# EAGLE board panelized (EAGLE 7.0.0)
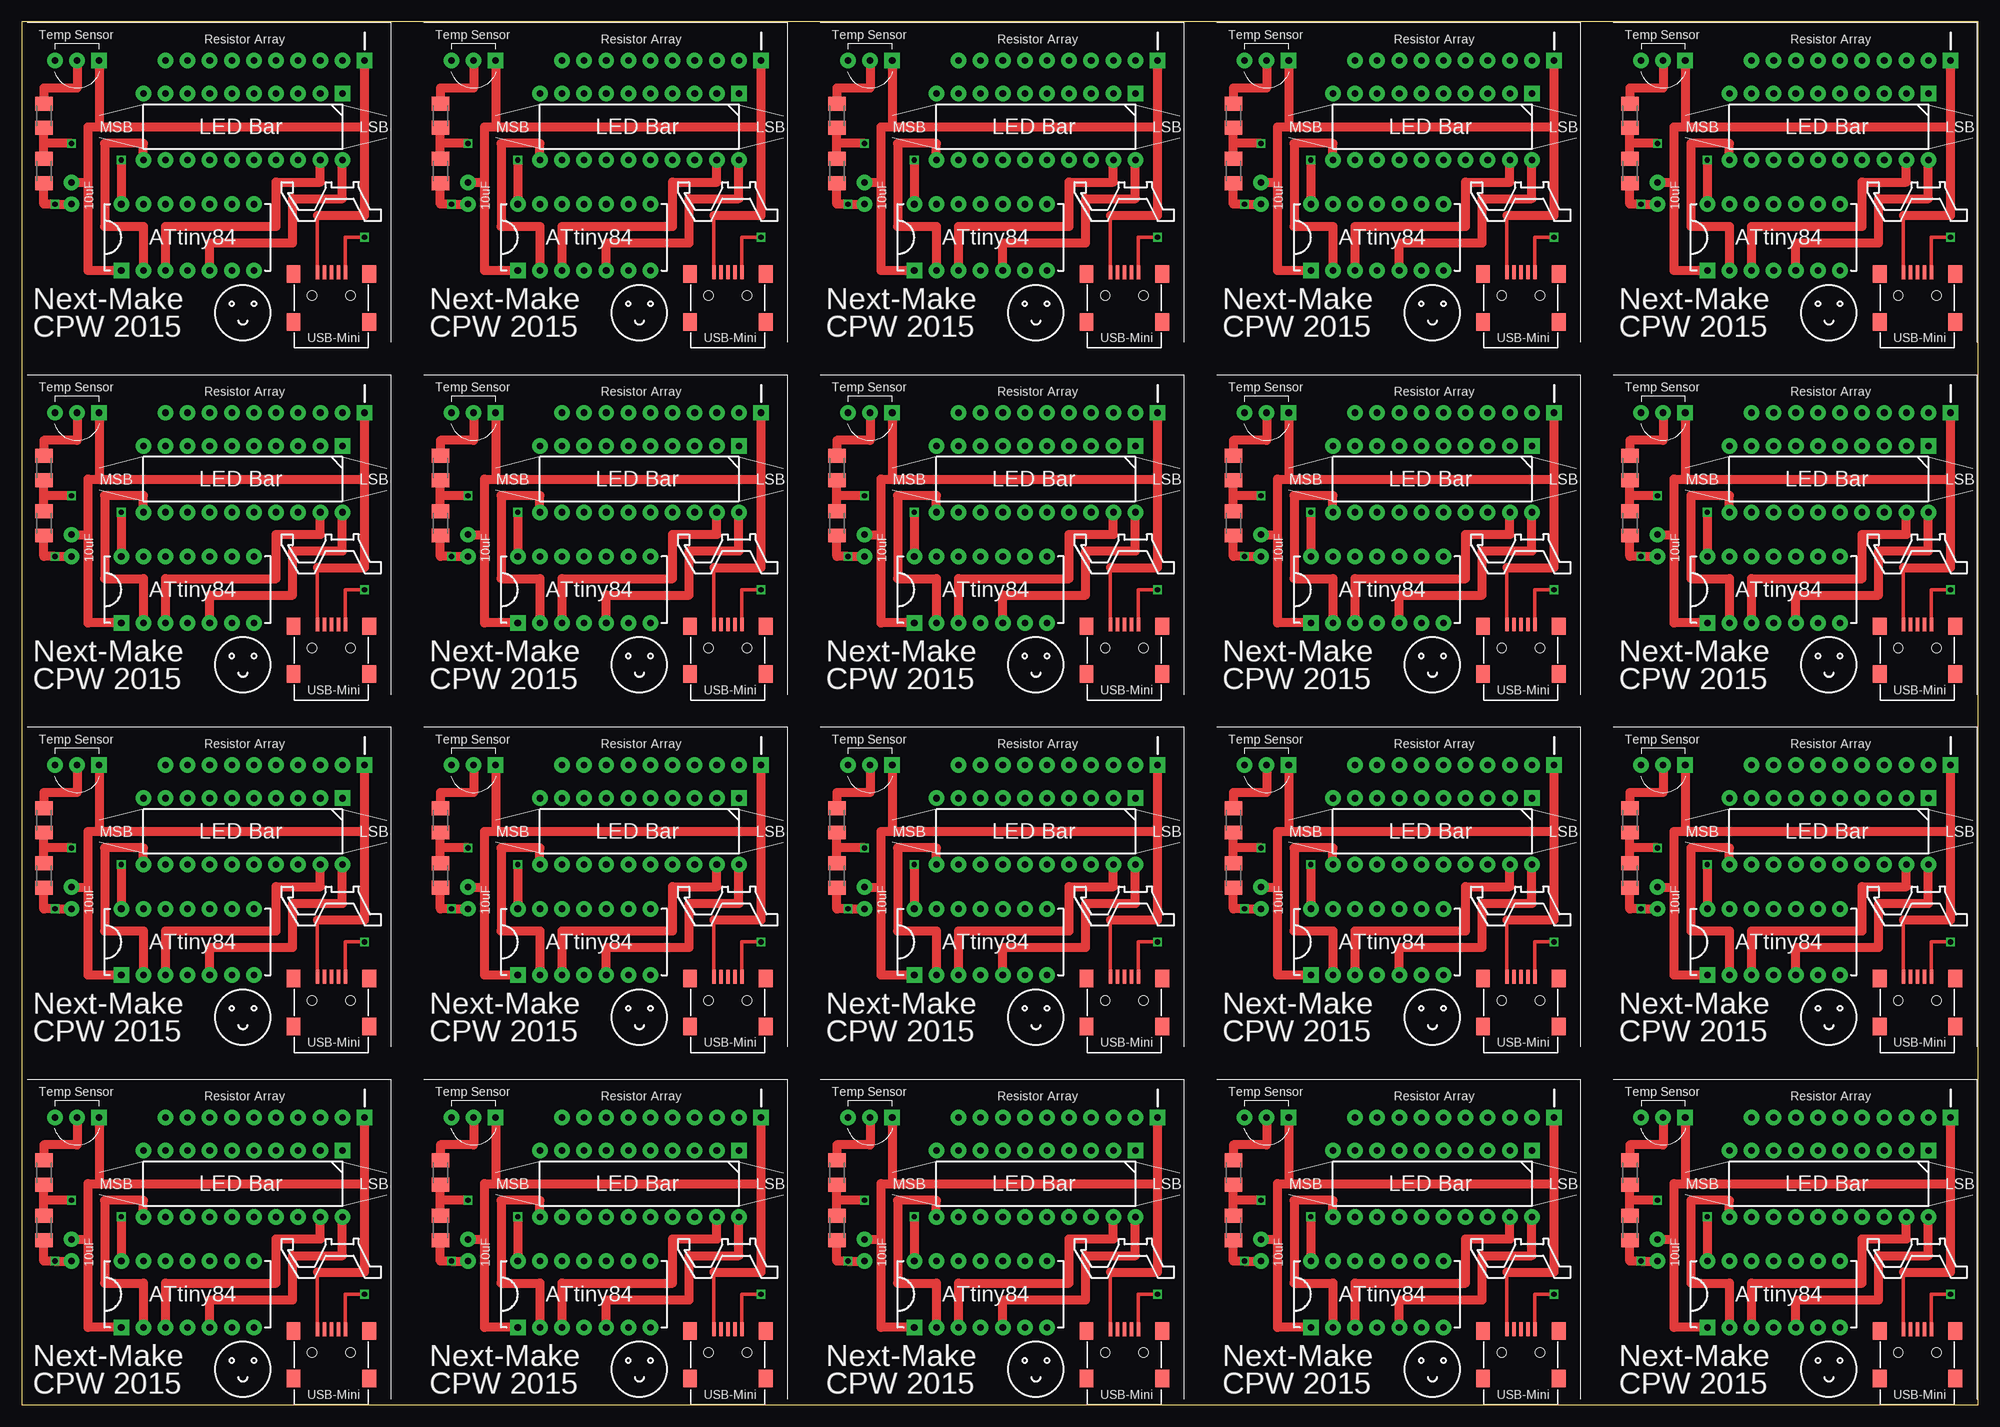
[diagram p0: board, top side]
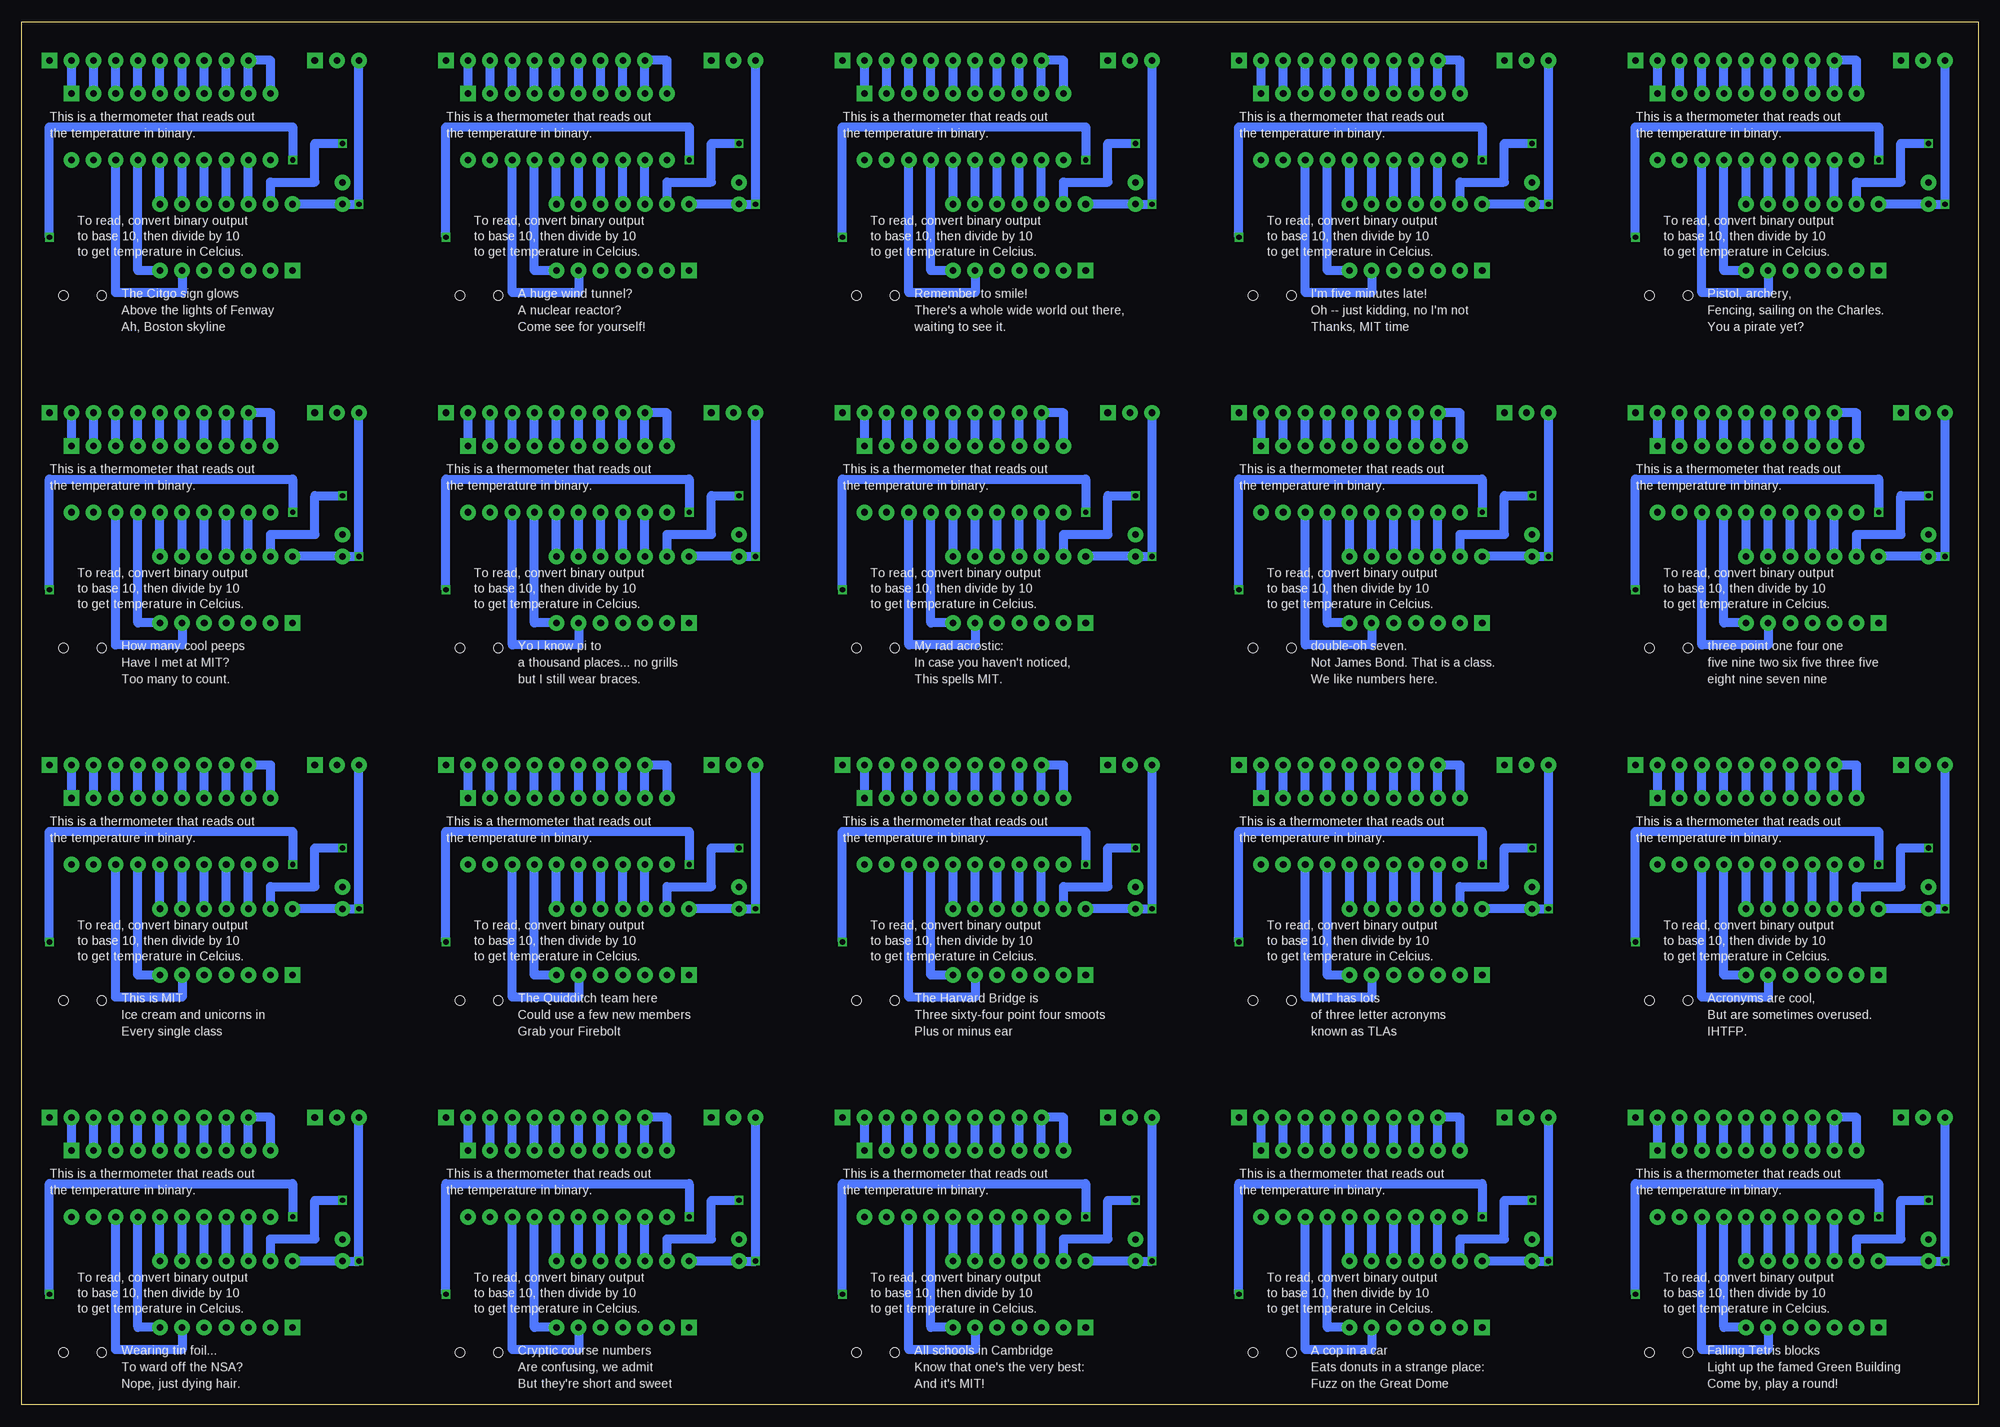
[diagram p1: board, bottom side, seen from below]

Size 224.72 x 158.86 mm. Coordinates in mm from the lower left corner, seen from the top.
Outline: 224.72,158.86 0,158.86 0,0 224.72,0 224.72,158.86
Copper layers (1*16): Top 0.035mm / dielectric 1.5mm / Bottom 0.035mm
Design rules "default *": minimum track width 10mil, minimum drill 24mil, track to track 8mil, track to pad 8mil, pad to pad 8mil, via to via 8mil, smd to smd 8mil, copper to edge 40mil, drill to drill 8mil, minimum pad ring 10mil, minimum via ring 8mil, stop-mask expansion 4mil, vias tented up to drill 25mil, thermal gap 10mil

## Footprints (pad centres in the part's own frame; a part is rotated, then mirrored left to right if it is on the bottom)
M1206 = smd 1.6 x 2: 1 -1.4,0; 2 1.4,0
SIP-10 = drill 0.762 pad 1.778 square: PIN_1 0,0 | drill 0.762 pad 1.778: PIN_2 0,-2.54; PIN_3 0,-5.08; PIN_4 0,-7.62; PIN_5 0,-10.16; PIN_6 0,-12.7; PIN_7 0,-15.24; PIN_8 0,-17.78; PIN_9 0,-20.32; PIN_10 0,-22.86
CAP_FK18 = drill 0.75 pad 1.75: PIN_1 0,0; PIN_2 2.5,0
PDIP-14 = drill 0.762 pad 1.778 square: PIN_1 0,15.24 | drill 0.762 pad 1.778: PIN_2 0,12.7; PIN_3 0,10.16; PIN_4 0,7.62; PIN_5 0,5.08; PIN_6 0,2.54; PIN_7 0,0; PIN_8 7.62,0; PIN_9 7.62,2.54; PIN_10 7.62,5.08; PIN_11 7.62,7.62; PIN_12 7.62,10.16; PIN_13 7.62,12.7; PIN_14 7.62,15.24
LED_X10_BAR = drill 0.762 pad 1.778 square: PIN_1 0,0 | drill 0.762 pad 1.778: PIN_2 0,-2.54; PIN_3 0,-5.08; PIN_4 0,-7.62; PIN_5 0,-10.16; PIN_6 0,-12.7; PIN_7 0,-15.24; PIN_8 0,-17.78; PIN_9 0,-20.32; PIN_10 0,-22.86; PIN_11 7.62,-22.86; PIN_12 7.62,-20.32; PIN_13 7.62,-17.78; PIN_14 7.62,-15.24; PIN_15 7.62,-12.7; PIN_16 7.62,-10.16; PIN_17 7.62,-7.62; PIN_18 7.62,-5.08; PIN_19 7.62,-2.54; PIN_20 7.62,0
TO-92-3 = drill 0.762 pad 1.778 square: PIN_1 0,0 | drill 0.762 pad 1.778: PIN_2 2.54,0; PIN_3 5.08,0
SMT_MINI_USB = smd 1.6 x 0.4: +5V 8.7,1.6; D+ 8.7,0; D- 8.7,0.8; GND 8.7,-1.6; ID 8.7,-0.8 | smd 2 x 1.6: FOOR_2 8.5,-4.35; FOOT_1 3,-4.35; FOOT_3 8.5,4.35; FOOT_4 3,4.35 | hole 1.1: 6,-2.2; 6,2.2

## Placement (x,y rotation side)
R1  1K  [M1206]  2.54,20.32 270 top
R2  1K  [M1206]  2.54,26.67 270 top
U$1  9X_1K_BUSSED_R  [SIP-10]  39.37,33.02 270 top
U$2  10UF_FK18  [CAP_FK18]  5.71,16.51 90 top
U$3  ATTINY84A  [PDIP-14]  26.67,8.89 90 top
U$4  LED_X10_BAR  [LED_X10_BAR]  36.83,29.21 270 top
U$5  MCP9701  [TO-92-3]  8.89,33.02 180 top
U$6  USB_MINI  [SMT_MINI_USB]  35.56,0 90 top
ZZZ$1  9X_1K_BUSSED_R  [SIP-10]  39.37,73.48 270 top
ZZZ$2  9X_1K_BUSSED_R  [SIP-10]  39.37,113.95 270 top
ZZZ$3  9X_1K_BUSSED_R  [SIP-10]  39.37,154.41 270 top
ZZZ$4  9X_1K_BUSSED_R  [SIP-10]  84.92,33.02 270 top
ZZZ$5  9X_1K_BUSSED_R  [SIP-10]  84.92,73.48 270 top
ZZZ$6  9X_1K_BUSSED_R  [SIP-10]  84.92,113.95 270 top
ZZZ$7  9X_1K_BUSSED_R  [SIP-10]  84.92,154.41 270 top
ZZZ$8  9X_1K_BUSSED_R  [SIP-10]  130.46,33.02 270 top
ZZZ$9  9X_1K_BUSSED_R  [SIP-10]  130.46,73.48 270 top
ZZZ$10  9X_1K_BUSSED_R  [SIP-10]  130.46,113.95 270 top
ZZZ$11  9X_1K_BUSSED_R  [SIP-10]  130.46,154.41 270 top
ZZZ$12  9X_1K_BUSSED_R  [SIP-10]  176,33.02 270 top
ZZZ$13  9X_1K_BUSSED_R  [SIP-10]  176,73.48 270 top
ZZZ$14  9X_1K_BUSSED_R  [SIP-10]  176,113.95 270 top
ZZZ$15  9X_1K_BUSSED_R  [SIP-10]  176,154.41 270 top
ZZZ$16  9X_1K_BUSSED_R  [SIP-10]  221.55,33.02 270 top
ZZZ$17  9X_1K_BUSSED_R  [SIP-10]  221.55,73.48 270 top
ZZZ$18  9X_1K_BUSSED_R  [SIP-10]  221.55,113.95 270 top
ZZZ$19  9X_1K_BUSSED_R  [SIP-10]  221.55,154.41 270 top
ZZZ$21  10UF_FK18  [CAP_FK18]  5.71,56.98 90 top
ZZZ$22  10UF_FK18  [CAP_FK18]  5.71,97.44 90 top
ZZZ$23  10UF_FK18  [CAP_FK18]  5.71,137.91 90 top
ZZZ$24  10UF_FK18  [CAP_FK18]  51.26,16.51 90 top
ZZZ$25  10UF_FK18  [CAP_FK18]  51.26,56.98 90 top
ZZZ$26  10UF_FK18  [CAP_FK18]  51.26,97.44 90 top
ZZZ$27  10UF_FK18  [CAP_FK18]  51.26,137.91 90 top
ZZZ$28  10UF_FK18  [CAP_FK18]  96.81,16.51 90 top
ZZZ$29  10UF_FK18  [CAP_FK18]  96.81,56.98 90 top
ZZZ$30  10UF_FK18  [CAP_FK18]  96.81,97.44 90 top
ZZZ$31  10UF_FK18  [CAP_FK18]  96.81,137.91 90 top
ZZZ$32  10UF_FK18  [CAP_FK18]  142.35,16.51 90 top
ZZZ$33  10UF_FK18  [CAP_FK18]  142.35,56.98 90 top
ZZZ$34  10UF_FK18  [CAP_FK18]  142.35,97.44 90 top
ZZZ$35  10UF_FK18  [CAP_FK18]  142.35,137.91 90 top
ZZZ$36  10UF_FK18  [CAP_FK18]  187.9,16.51 90 top
ZZZ$37  10UF_FK18  [CAP_FK18]  187.9,56.98 90 top
ZZZ$38  10UF_FK18  [CAP_FK18]  187.9,97.44 90 top
ZZZ$39  10UF_FK18  [CAP_FK18]  187.9,137.91 90 top
ZZZ$41  ATTINY84A  [PDIP-14]  26.67,49.35 90 top
ZZZ$42  ATTINY84A  [PDIP-14]  26.67,89.82 90 top
ZZZ$43  ATTINY84A  [PDIP-14]  26.67,130.28 90 top
ZZZ$44  ATTINY84A  [PDIP-14]  72.22,8.89 90 top
ZZZ$45  ATTINY84A  [PDIP-14]  72.22,49.35 90 top
ZZZ$46  ATTINY84A  [PDIP-14]  72.22,89.82 90 top
ZZZ$47  ATTINY84A  [PDIP-14]  72.22,130.28 90 top
ZZZ$48  ATTINY84A  [PDIP-14]  117.76,8.89 90 top
ZZZ$49  ATTINY84A  [PDIP-14]  117.76,49.35 90 top
ZZZ$50  ATTINY84A  [PDIP-14]  117.76,89.82 90 top
ZZZ$51  ATTINY84A  [PDIP-14]  117.76,130.28 90 top
ZZZ$52  ATTINY84A  [PDIP-14]  163.31,8.89 90 top
ZZZ$53  ATTINY84A  [PDIP-14]  163.31,49.35 90 top
ZZZ$54  ATTINY84A  [PDIP-14]  163.31,89.82 90 top
ZZZ$55  ATTINY84A  [PDIP-14]  163.31,130.28 90 top
ZZZ$56  ATTINY84A  [PDIP-14]  208.85,8.89 90 top
ZZZ$57  ATTINY84A  [PDIP-14]  208.85,49.35 90 top
ZZZ$58  ATTINY84A  [PDIP-14]  208.85,89.82 90 top
ZZZ$59  ATTINY84A  [PDIP-14]  208.85,130.28 90 top
ZZZ$61  LED_X10_BAR  [LED_X10_BAR]  36.83,69.67 270 top
ZZZ$62  LED_X10_BAR  [LED_X10_BAR]  36.83,110.14 270 top
ZZZ$63  LED_X10_BAR  [LED_X10_BAR]  36.83,150.6 270 top
ZZZ$64  LED_X10_BAR  [LED_X10_BAR]  82.38,29.21 270 top
ZZZ$65  LED_X10_BAR  [LED_X10_BAR]  82.38,69.67 270 top
ZZZ$66  LED_X10_BAR  [LED_X10_BAR]  82.38,110.14 270 top
ZZZ$67  LED_X10_BAR  [LED_X10_BAR]  82.38,150.6 270 top
ZZZ$68  LED_X10_BAR  [LED_X10_BAR]  127.92,29.21 270 top
ZZZ$69  LED_X10_BAR  [LED_X10_BAR]  127.92,69.67 270 top
ZZZ$70  LED_X10_BAR  [LED_X10_BAR]  127.92,110.14 270 top
ZZZ$71  LED_X10_BAR  [LED_X10_BAR]  127.92,150.6 270 top
ZZZ$72  LED_X10_BAR  [LED_X10_BAR]  173.47,29.21 270 top
ZZZ$73  LED_X10_BAR  [LED_X10_BAR]  173.47,69.67 270 top
ZZZ$74  LED_X10_BAR  [LED_X10_BAR]  173.47,110.14 270 top
ZZZ$75  LED_X10_BAR  [LED_X10_BAR]  173.47,150.6 270 top
ZZZ$76  LED_X10_BAR  [LED_X10_BAR]  219.01,29.21 270 top
ZZZ$77  LED_X10_BAR  [LED_X10_BAR]  219.01,69.67 270 top
ZZZ$78  LED_X10_BAR  [LED_X10_BAR]  219.01,110.14 270 top
ZZZ$79  LED_X10_BAR  [LED_X10_BAR]  219.01,150.6 270 top
ZZZ$81  MCP9701  [TO-92-3]  8.89,73.48 180 top
ZZZ$82  MCP9701  [TO-92-3]  8.89,113.95 180 top
ZZZ$83  MCP9701  [TO-92-3]  8.89,154.41 180 top
ZZZ$84  MCP9701  [TO-92-3]  54.44,33.02 180 top
ZZZ$85  MCP9701  [TO-92-3]  54.44,73.48 180 top
ZZZ$86  MCP9701  [TO-92-3]  54.44,113.95 180 top
ZZZ$87  MCP9701  [TO-92-3]  54.44,154.41 180 top
ZZZ$88  MCP9701  [TO-92-3]  99.98,33.02 180 top
ZZZ$89  MCP9701  [TO-92-3]  99.98,73.48 180 top
ZZZ$90  MCP9701  [TO-92-3]  99.98,113.95 180 top
ZZZ$91  MCP9701  [TO-92-3]  99.98,154.41 180 top
ZZZ$92  MCP9701  [TO-92-3]  145.53,33.02 180 top
ZZZ$93  MCP9701  [TO-92-3]  145.53,73.48 180 top
ZZZ$94  MCP9701  [TO-92-3]  145.53,113.95 180 top
ZZZ$95  MCP9701  [TO-92-3]  145.53,154.41 180 top
ZZZ$96  MCP9701  [TO-92-3]  191.07,33.02 180 top
ZZZ$97  MCP9701  [TO-92-3]  191.07,73.48 180 top
ZZZ$98  MCP9701  [TO-92-3]  191.07,113.95 180 top
ZZZ$99  MCP9701  [TO-92-3]  191.07,154.41 180 top
ZZZ$101  USB_MINI  [SMT_MINI_USB]  35.56,40.47 90 top
ZZZ$102  USB_MINI  [SMT_MINI_USB]  35.56,80.93 90 top
ZZZ$103  USB_MINI  [SMT_MINI_USB]  35.56,121.39 90 top
ZZZ$104  USB_MINI  [SMT_MINI_USB]  81.11,0 90 top
ZZZ$105  USB_MINI  [SMT_MINI_USB]  81.11,40.47 90 top
ZZZ$106  USB_MINI  [SMT_MINI_USB]  81.11,80.93 90 top
ZZZ$107  USB_MINI  [SMT_MINI_USB]  81.11,121.39 90 top
ZZZ$108  USB_MINI  [SMT_MINI_USB]  126.65,0 90 top
ZZZ$109  USB_MINI  [SMT_MINI_USB]  126.65,40.47 90 top
ZZZ$110  USB_MINI  [SMT_MINI_USB]  126.65,80.93 90 top
ZZZ$111  USB_MINI  [SMT_MINI_USB]  126.65,121.39 90 top
ZZZ$112  USB_MINI  [SMT_MINI_USB]  172.19,0 90 top
ZZZ$113  USB_MINI  [SMT_MINI_USB]  172.19,40.47 90 top
ZZZ$114  USB_MINI  [SMT_MINI_USB]  172.19,80.93 90 top
ZZZ$115  USB_MINI  [SMT_MINI_USB]  172.19,121.39 90 top
ZZZ$116  USB_MINI  [SMT_MINI_USB]  217.74,0 90 top
ZZZ$117  USB_MINI  [SMT_MINI_USB]  217.74,40.47 90 top
ZZZ$118  USB_MINI  [SMT_MINI_USB]  217.74,80.93 90 top
ZZZ$119  USB_MINI  [SMT_MINI_USB]  217.74,121.39 90 top
ZZZ$121  1K  [M1206]  2.54,60.78 270 top
ZZZ$122  1K  [M1206]  2.54,101.25 270 top
ZZZ$123  1K  [M1206]  2.54,141.72 270 top
ZZZ$124  1K  [M1206]  48.09,20.32 270 top
ZZZ$125  1K  [M1206]  48.09,60.78 270 top
ZZZ$126  1K  [M1206]  48.09,101.25 270 top
ZZZ$127  1K  [M1206]  48.09,141.72 270 top
ZZZ$128  1K  [M1206]  93.63,20.32 270 top
ZZZ$129  1K  [M1206]  93.63,60.78 270 top
ZZZ$130  1K  [M1206]  93.63,101.25 270 top
ZZZ$131  1K  [M1206]  93.63,141.72 270 top
ZZZ$132  1K  [M1206]  139.18,20.32 270 top
ZZZ$133  1K  [M1206]  139.18,60.78 270 top
ZZZ$134  1K  [M1206]  139.18,101.25 270 top
ZZZ$135  1K  [M1206]  139.18,141.72 270 top
ZZZ$136  1K  [M1206]  184.72,20.32 270 top
ZZZ$137  1K  [M1206]  184.72,60.78 270 top
ZZZ$138  1K  [M1206]  184.72,101.25 270 top
ZZZ$139  1K  [M1206]  184.72,141.72 270 top
ZZZ$141  1K  [M1206]  2.54,67.14 270 top
ZZZ$142  1K  [M1206]  2.54,107.6 270 top
ZZZ$143  1K  [M1206]  2.54,148.06 270 top
ZZZ$144  1K  [M1206]  48.09,26.67 270 top
ZZZ$145  1K  [M1206]  48.09,67.14 270 top
ZZZ$146  1K  [M1206]  48.09,107.6 270 top
ZZZ$147  1K  [M1206]  48.09,148.06 270 top
ZZZ$148  1K  [M1206]  93.63,26.67 270 top
ZZZ$149  1K  [M1206]  93.63,67.14 270 top
ZZZ$150  1K  [M1206]  93.63,107.6 270 top
ZZZ$151  1K  [M1206]  93.63,148.06 270 top
ZZZ$152  1K  [M1206]  139.18,26.67 270 top
ZZZ$153  1K  [M1206]  139.18,67.14 270 top
ZZZ$154  1K  [M1206]  139.18,107.6 270 top
ZZZ$155  1K  [M1206]  139.18,148.06 270 top
ZZZ$156  1K  [M1206]  184.72,26.67 270 top
ZZZ$157  1K  [M1206]  184.72,67.14 270 top
ZZZ$158  1K  [M1206]  184.72,107.6 270 top
ZZZ$159  1K  [M1206]  184.72,148.06 270 top

## Library data of the parts
R1 R2 ZZZ$121-ZZZ$139 ZZZ$141-ZZZ$159 = rcl
U$1-U$6 ZZZ$1-ZZZ$19 ZZZ$21-ZZZ$39 ZZZ$41-ZZZ$59 ZZZ$61-ZZZ$79 ZZZ$81-ZZZ$99 ZZZ$101-ZZZ$119 = Next_Make_CPW_2015

## Nets
5V: U$1.PIN_1 U$2.PIN_2 U$3.PIN_1 U$5.PIN_1 U$6.+5V
GND: R1.2 U$2.PIN_1 U$3.PIN_14 U$5.PIN_3 U$6.GND
N$1: U$1.PIN_2 U$4.PIN_1
N$2: U$1.PIN_3 U$4.PIN_2
N$3: U$1.PIN_4 U$4.PIN_3
N$4: U$1.PIN_5 U$4.PIN_4
N$5: U$1.PIN_6 U$4.PIN_5
N$6: U$1.PIN_7 U$4.PIN_6
N$7: U$1.PIN_8 U$4.PIN_7
N$8: U$1.PIN_9 U$4.PIN_8
N$9: R2.1 U$5.PIN_2
N$10: R1.1 R2.2 U$3.PIN_13
N$11: U$3.PIN_11 U$4.PIN_13
N$12: U$3.PIN_12 U$4.PIN_12
N$13: U$3.PIN_10 U$4.PIN_14
N$14: U$3.PIN_9 U$4.PIN_15
N$15: U$3.PIN_8 U$4.PIN_16
N$16: U$3.PIN_7 U$4.PIN_17
N$17: U$3.PIN_6 U$4.PIN_18
N$18: U$3.PIN_3 U$4.PIN_19
N$19: U$3.PIN_5 U$4.PIN_20
N$20: U$1.PIN_10 U$4.PIN_9 U$4.PIN_10
N$21: U$3.PIN_2 U$4.PIN_11

## Tracks (layer width: path | path; a pad name or v marks a point on that pad's centre or on a via)
5V
  Top 0.406: U$6.+5V 33.96,15.24 | 33.96,49.16 33.96,55.7 | 33.96,89.63 33.96,96.17 | 33.96,130.09 33.96,136.63 | 79.5,8.7 79.5,15.24 | 79.5,49.16 79.5,55.7 | 79.5,89.63 79.5,96.17 | 79.5,130.09 79.5,136.63 | 125.05,8.7 125.05,15.24 | 125.05,49.16 125.05,55.7 | 125.05,89.63 125.05,96.17 | 125.05,130.09 125.05,136.63 | 170.59,8.7 170.59,15.24 | 170.59,49.16 170.59,55.7 | 170.59,89.63 170.59,96.17 | 170.59,130.09 170.59,136.63 | 216.14,8.7 216.14,15.24 | 216.14,49.16 216.14,55.7 | 216.14,89.63 216.14,96.17 | 216.14,130.09 216.14,136.63
  Top 1.016: 33.96,15.24 39.37,15.24 39.37,25.4 | 33.96,55.7 39.37,55.7 39.37,65.86 | 33.96,96.17 39.37,96.17 39.37,106.33 | 33.96,136.63 39.37,136.63 39.37,146.79 | 79.5,15.24 84.92,15.24 84.92,25.4 | 79.5,55.7 84.92,55.7 84.92,65.86 | 79.5,96.17 84.92,96.17 84.92,106.33 | 79.5,136.63 84.92,136.63 84.92,146.79 | 125.05,15.24 130.46,15.24 130.46,25.4 | 125.05,55.7 130.46,55.7 130.46,65.86 | 125.05,96.17 130.46,96.17 130.46,106.33 | 125.05,136.63 130.46,136.63 130.46,146.79 | 170.59,15.24 176,15.24 176,25.4 | 170.59,55.7 176,55.7 176,65.86 | 170.59,96.17 176,96.17 176,106.33 | 170.59,136.63 176,136.63 176,146.79 | 216.14,15.24 221.55,15.24 221.55,25.4 | 216.14,55.7 221.55,55.7 221.55,65.86 | 216.14,96.17 221.55,96.17 221.55,106.33 | 216.14,136.63 221.55,136.63 221.55,146.79 | 39.37,25.4 U$1.PIN_1 | 39.37,65.86 39.37,73.48 | 39.37,106.33 39.37,113.95 | 39.37,146.79 39.37,154.41 | 84.92,25.4 84.92,33.02 | 84.92,65.86 84.92,73.48 | 84.92,106.33 84.92,113.95 | 84.92,146.79 84.92,154.41 | 130.46,25.4 130.46,33.02 | 130.46,65.86 130.46,73.48 | 130.46,106.33 130.46,113.95 | 130.46,146.79 130.46,154.41 | 176,25.4 176,33.02 | 176,65.86 176,73.48 | 176,106.33 176,113.95 | 176,146.79 176,154.41 | 221.55,25.4 221.55,33.02 | 221.55,65.86 221.55,73.48 | 221.55,106.33 221.55,113.95 | 221.55,146.79 221.55,154.41 | U$3.PIN_1 7.62,8.89 7.62,19.01 | 11.43,49.35 7.62,49.35 7.62,59.48 | 11.43,89.82 7.62,89.82 7.62,99.94 | 11.43,130.28 7.62,130.28 7.62,140.41 | 56.98,8.89 53.16,8.89 53.16,19.01 | 56.98,49.35 53.16,49.35 53.16,59.48 | 56.98,89.82 53.16,89.82 53.16,99.94 | 56.98,130.28 53.16,130.28 53.16,140.41 | 102.52,8.89 98.71,8.89 98.71,19.01 | 102.52,49.35 98.71,49.35 98.71,59.48
  Top 1.016: 102.52,89.82 98.71,89.82 98.71,99.94 | 102.52,130.28 98.71,130.28 98.71,140.41 | 148.06,8.89 144.25,8.89 144.25,19.01 | 148.06,49.35 144.25,49.35 144.25,59.48 | 148.06,89.82 144.25,89.82 144.25,99.94 | 148.06,130.28 144.25,130.28 144.25,140.41 | 193.61,8.89 189.8,8.89 189.8,19.01 | 193.61,49.35 189.8,49.35 189.8,59.48 | 193.61,89.82 189.8,89.82 189.8,99.94 | 193.61,130.28 189.8,130.28 189.8,140.41 | 7.62,19.01 7.62,25.4 8.89,25.4 | 7.62,59.48 7.62,65.86 8.89,65.86 | 7.62,99.94 7.62,106.33 8.89,106.33 | 7.62,140.41 7.62,146.79 8.89,146.79 | 53.16,19.01 53.16,25.4 54.44,25.4 | 53.16,59.48 53.16,65.86 54.44,65.86 | 53.16,99.94 53.16,106.33 54.44,106.33 | 53.16,140.41 53.16,146.79 54.44,146.79 | 98.71,19.01 98.71,25.4 99.98,25.4 | 98.71,59.48 98.71,65.86 99.98,65.86 | 98.71,99.94 98.71,106.33 99.98,106.33 | 98.71,140.41 98.71,146.79 99.98,146.79 | 144.25,19.01 144.25,25.4 145.53,25.4 | 144.25,59.48 144.25,65.86 145.53,65.86 | 144.25,99.94 144.25,106.33 145.53,106.33 | 144.25,140.41 144.25,146.79 145.53,146.79 | 189.8,19.01 189.8,25.4 191.07,25.4 | 189.8,59.48 189.8,65.86 191.07,65.86 | 189.8,99.94 189.8,106.33 191.07,106.33 | 189.8,140.41 189.8,146.79 191.07,146.79 | 8.89,25.4 39.37,25.4 | 8.89,65.86 39.37,65.86 | 8.89,106.33 39.37,106.33 | 8.89,146.79 39.37,146.79 | 54.44,25.4 84.92,25.4 | 54.44,65.86 84.92,65.86 | 54.44,106.33 84.92,106.33 | 54.44,146.79 84.92,146.79 | 99.98,25.4 130.46,25.4 | 99.98,65.86 130.46,65.86 | 99.98,106.33 130.46,106.33 | 99.98,146.79 130.46,146.79 | 145.53,25.4 176,25.4 | 145.53,65.86 176,65.86 | 145.53,106.33 176,106.33 | 145.53,146.79 176,146.79 | 191.07,25.4 221.55,25.4 | 191.07,65.86 221.55,65.86
  Top 1.016: 191.07,106.33 221.55,106.33 | 191.07,146.79 221.55,146.79 | U$2.PIN_2 7.62,19.01 | 5.71,59.48 7.62,59.48 | 5.71,99.94 7.62,99.94 | 5.71,140.41 7.62,140.41 | 51.26,19.01 53.16,19.01 | 51.26,59.48 53.16,59.48 | 51.26,99.94 53.16,99.94 | 51.26,140.41 53.16,140.41 | 96.81,19.01 98.71,19.01 | 96.81,59.48 98.71,59.48 | 96.81,99.94 98.71,99.94 | 96.81,140.41 98.71,140.41 | 142.35,19.01 144.25,19.01 | 142.35,59.48 144.25,59.48 | 142.35,99.94 144.25,99.94 | 142.35,140.41 144.25,140.41 | 187.9,19.01 189.8,19.01 | 187.9,59.48 189.8,59.48 | 187.9,99.94 189.8,99.94 | 187.9,140.41 189.8,140.41 | U$5.PIN_1 8.89,25.4 | 8.89,73.48 8.89,65.86 | 8.89,113.95 8.89,106.33 | 8.89,154.41 8.89,146.79 | 54.44,33.02 54.44,25.4 | 54.44,73.48 54.44,65.86 | 54.44,113.95 54.44,106.33 | 54.44,154.41 54.44,146.79 | 99.98,33.02 99.98,25.4 | 99.98,73.48 99.98,65.86 | 99.98,113.95 99.98,106.33 | 99.98,154.41 99.98,146.79 | 145.53,33.02 145.53,25.4 | 145.53,73.48 145.53,65.86 | 145.53,113.95 145.53,106.33 | 145.53,154.41 145.53,146.79 | 191.07,33.02 191.07,25.4 | 191.07,73.48 191.07,65.86 | 191.07,113.95 191.07,106.33 | 191.07,154.41 191.07,146.79
GND  (via drill 0.6)
  Top 0.406: U$6.GND 37.16,12.7 v39.37,12.7 | 37.16,49.16 37.16,53.16 v39.37,53.16 | 37.16,89.63 37.16,93.63 v39.37,93.63 | 37.16,130.09 37.16,134.09 v39.37,134.09 | 82.7,8.7 82.7,12.7 v84.92,12.7 | 82.7,49.16 82.7,53.16 v84.92,53.16 | 82.7,89.63 82.7,93.63 v84.92,93.63 | 82.7,130.09 82.7,134.09 v84.92,134.09 | 128.25,8.7 128.25,12.7 v130.46,12.7 | 128.25,49.16 128.25,53.16 v130.46,53.16 | 128.25,89.63 128.25,93.63 v130.46,93.63 | 128.25,130.09 128.25,134.09 v130.46,134.09 | 173.79,8.7 173.79,12.7 v176,12.7 | 173.79,49.16 173.79,53.16 v176,53.16 | 173.79,89.63 173.79,93.63 v176,93.63 | 173.79,130.09 173.79,134.09 v176,134.09 | 219.34,8.7 219.34,12.7 v221.55,12.7 | 219.34,49.16 219.34,53.16 v221.55,53.16 | 219.34,89.63 219.34,93.63 v221.55,93.63 | 219.34,130.09 219.34,134.09 v221.55,134.09
  Top 1.016: v11.43,21.59 U$3.PIN_14 | v11.43,62.05 11.43,56.98 | v11.43,102.52 11.43,97.44 | v11.43,142.99 11.43,137.91 | v56.98,21.59 56.98,16.51 | v56.98,62.05 56.98,56.98 | v56.98,102.52 56.98,97.44 | v56.98,142.99 56.98,137.91 | v102.52,21.59 102.52,16.51 | v102.52,62.05 102.52,56.98 | v102.52,102.52 102.52,97.44 | v102.52,142.99 102.52,137.91 | v148.06,21.59 148.06,16.51 | v148.06,62.05 148.06,56.98 | v148.06,102.52 148.06,97.44 | v148.06,142.99 148.06,137.91 | v193.61,21.59 193.61,16.51 | v193.61,62.05 193.61,56.98 | v193.61,102.52 193.61,97.44 | v193.61,142.99 193.61,137.91 | R1.2 2.54,16.51 v3.81,16.51 U$2.PIN_1 | 2.54,59.38 2.54,56.98 v3.81,56.98 5.71,56.98 | 2.54,99.85 2.54,97.44 v3.81,97.44 5.71,97.44 | 2.54,140.31 2.54,137.91 v3.81,137.91 5.71,137.91 | 48.09,18.92 48.09,16.51 v49.35,16.51 51.26,16.51 | 48.09,59.38 48.09,56.98 v49.35,56.98 51.26,56.98 | 48.09,99.85 48.09,97.44 v49.35,97.44 51.26,97.44 | 48.09,140.31 48.09,137.91 v49.35,137.91 51.26,137.91 | 93.63,18.92 93.63,16.51 v94.9,16.51 96.81,16.51 | 93.63,59.38 93.63,56.98 v94.9,56.98 96.81,56.98 | 93.63,99.85 93.63,97.44 v94.9,97.44 96.81,97.44 | 93.63,140.31 93.63,137.91 v94.9,137.91 96.81,137.91 | 139.18,18.92 139.18,16.51 v140.44,16.51 142.35,16.51 | 139.18,59.38 139.18,56.98 v140.44,56.98 142.35,56.98 | 139.18,99.85 139.18,97.44 v140.44,97.44 142.35,97.44 | 139.18,140.31 139.18,137.91 v140.44,137.91 142.35,137.91 | 184.72,18.92 184.72,16.51 v185.99,16.51 187.9,16.51 | 184.72,59.38 184.72,56.98 v185.99,56.98 187.9,56.98 | 184.72,99.85 184.72,97.44 v185.99,97.44 187.9,97.44 | 184.72,140.31 184.72,137.91 v185.99,137.91 187.9,137.91
  Bottom 1.016: v39.37,12.7 39.37,25.4 11.43,25.4 v11.43,21.59 | v39.37,53.16 39.37,65.86 11.43,65.86 v11.43,62.05 | v39.37,93.63 39.37,106.33 11.43,106.33 v11.43,102.52 | v39.37,134.09 39.37,146.79 11.43,146.79 v11.43,142.99 | v84.92,12.7 84.92,25.4 56.98,25.4 v56.98,21.59 | v84.92,53.16 84.92,65.86 56.98,65.86 v56.98,62.05 | v84.92,93.63 84.92,106.33 56.98,106.33 v56.98,102.52 | v84.92,134.09 84.92,146.79 56.98,146.79 v56.98,142.99 | v130.46,12.7 130.46,25.4 102.52,25.4 v102.52,21.59 | v130.46,53.16 130.46,65.86 102.52,65.86 v102.52,62.05 | v130.46,93.63 130.46,106.33 102.52,106.33 v102.52,102.52 | v130.46,134.09 130.46,146.79 102.52,146.79 v102.52,142.99 | v176,12.7 176,25.4 148.06,25.4 v148.06,21.59 | v176,53.16 176,65.86 148.06,65.86 v148.06,62.05 | v176,93.63 176,106.33 148.06,106.33 v148.06,102.52 | v176,134.09 176,146.79 148.06,146.79 v148.06,142.99 | v221.55,12.7 221.55,25.4 193.61,25.4 v193.61,21.59 | v221.55,53.16 221.55,65.86 193.61,65.86 v193.61,62.05 | v221.55,93.63 221.55,106.33 193.61,106.33 v193.61,102.52 | v221.55,134.09 221.55,146.79 193.61,146.79 v193.61,142.99 | U$3.PIN_14 U$2.PIN_1 v3.81,16.51 U$5.PIN_3 | 11.43,56.98 5.71,56.98 v3.81,56.98 3.81,73.48 | 11.43,97.44 5.71,97.44 v3.81,97.44 3.81,113.95 | 11.43,137.91 5.71,137.91 v3.81,137.91 3.81,154.41 | 56.98,16.51 51.26,16.51 v49.35,16.51 49.35,33.02 | 56.98,56.98 51.26,56.98 v49.35,56.98 49.35,73.48 | 56.98,97.44 51.26,97.44 v49.35,97.44 49.35,113.95 | 56.98,137.91 51.26,137.91 v49.35,137.91 49.35,154.41 | 102.52,16.51 96.81,16.51 v94.9,16.51 94.9,33.02 | 102.52,56.98 96.81,56.98 v94.9,56.98 94.9,73.48 | 102.52,97.44 96.81,97.44 v94.9,97.44 94.9,113.95
  Bottom 1.016: 102.52,137.91 96.81,137.91 v94.9,137.91 94.9,154.41 | 148.06,16.51 142.35,16.51 v140.44,16.51 140.44,33.02 | 148.06,56.98 142.35,56.98 v140.44,56.98 140.44,73.48 | 148.06,97.44 142.35,97.44 v140.44,97.44 140.44,113.95 | 148.06,137.91 142.35,137.91 v140.44,137.91 140.44,154.41 | 193.61,16.51 187.9,16.51 v185.99,16.51 185.99,33.02 | 193.61,56.98 187.9,56.98 v185.99,56.98 185.99,73.48 | 193.61,97.44 187.9,97.44 v185.99,97.44 185.99,113.95 | 193.61,137.91 187.9,137.91 v185.99,137.91 185.99,154.41
N$1
  Bottom 1.016: U$4.PIN_1 U$1.PIN_2 | 36.83,69.67 36.83,73.48 | 36.83,110.14 36.83,113.95 | 36.83,150.6 36.83,154.41 | 82.38,29.21 82.38,33.02 | 82.38,69.67 82.38,73.48 | 82.38,110.14 82.38,113.95 | 82.38,150.6 82.38,154.41 | 127.92,29.21 127.92,33.02 | 127.92,69.67 127.92,73.48 | 127.92,110.14 127.92,113.95 | 127.92,150.6 127.92,154.41 | 173.47,29.21 173.47,33.02 | 173.47,69.67 173.47,73.48 | 173.47,110.14 173.47,113.95 | 173.47,150.6 173.47,154.41 | 219.01,29.21 219.01,33.02 | 219.01,69.67 219.01,73.48 | 219.01,110.14 219.01,113.95 | 219.01,150.6 219.01,154.41
N$2
  Bottom 1.016: U$4.PIN_2 U$1.PIN_3 | 34.29,69.67 34.29,73.48 | 34.29,110.14 34.29,113.95 | 34.29,150.6 34.29,154.41 | 79.83,29.21 79.83,33.02 | 79.83,69.67 79.83,73.48 | 79.83,110.14 79.83,113.95 | 79.83,150.6 79.83,154.41 | 125.38,29.21 125.38,33.02 | 125.38,69.67 125.38,73.48 | 125.38,110.14 125.38,113.95 | 125.38,150.6 125.38,154.41 | 170.93,29.21 170.93,33.02 | 170.93,69.67 170.93,73.48 | 170.93,110.14 170.93,113.95 | 170.93,150.6 170.93,154.41 | 216.47,29.21 216.47,33.02 | 216.47,69.67 216.47,73.48 | 216.47,110.14 216.47,113.95 | 216.47,150.6 216.47,154.41
N$3
  Bottom 1.016: U$4.PIN_3 U$1.PIN_4 | 31.75,69.67 31.75,73.48 | 31.75,110.14 31.75,113.95 | 31.75,150.6 31.75,154.41 | 77.3,29.21 77.3,33.02 | 77.3,69.67 77.3,73.48 | 77.3,110.14 77.3,113.95 | 77.3,150.6 77.3,154.41 | 122.84,29.21 122.84,33.02 | 122.84,69.67 122.84,73.48 | 122.84,110.14 122.84,113.95 | 122.84,150.6 122.84,154.41 | 168.38,29.21 168.38,33.02 | 168.38,69.67 168.38,73.48 | 168.38,110.14 168.38,113.95 | 168.38,150.6 168.38,154.41 | 213.93,29.21 213.93,33.02 | 213.93,69.67 213.93,73.48 | 213.93,110.14 213.93,113.95 | 213.93,150.6 213.93,154.41
N$4
  Bottom 1.016: U$4.PIN_4 U$1.PIN_5 | 29.21,69.67 29.21,73.48 | 29.21,110.14 29.21,113.95 | 29.21,150.6 29.21,154.41 | 74.75,29.21 74.75,33.02 | 74.75,69.67 74.75,73.48 | 74.75,110.14 74.75,113.95 | 74.75,150.6 74.75,154.41 | 120.3,29.21 120.3,33.02 | 120.3,69.67 120.3,73.48 | 120.3,110.14 120.3,113.95 | 120.3,150.6 120.3,154.41 | 165.84,29.21 165.84,33.02 | 165.84,69.67 165.84,73.48 | 165.84,110.14 165.84,113.95 | 165.84,150.6 165.84,154.41 | 211.39,29.21 211.39,33.02 | 211.39,69.67 211.39,73.48 | 211.39,110.14 211.39,113.95 | 211.39,150.6 211.39,154.41
N$5
  Bottom 1.016: U$4.PIN_5 U$1.PIN_6 | 26.67,69.67 26.67,73.48 | 26.67,110.14 26.67,113.95 | 26.67,150.6 26.67,154.41 | 72.22,29.21 72.22,33.02 | 72.22,69.67 72.22,73.48 | 72.22,110.14 72.22,113.95 | 72.22,150.6 72.22,154.41 | 117.76,29.21 117.76,33.02 | 117.76,69.67 117.76,73.48 | 117.76,110.14 117.76,113.95 | 117.76,150.6 117.76,154.41 | 163.31,29.21 163.31,33.02 | 163.31,69.67 163.31,73.48 | 163.31,110.14 163.31,113.95 | 163.31,150.6 163.31,154.41 | 208.85,29.21 208.85,33.02 | 208.85,69.67 208.85,73.48 | 208.85,110.14 208.85,113.95 | 208.85,150.6 208.85,154.41
N$6
  Bottom 1.016: U$4.PIN_6 U$1.PIN_7 | 24.13,69.67 24.13,73.48 | 24.13,110.14 24.13,113.95 | 24.13,150.6 24.13,154.41 | 69.67,29.21 69.67,33.02 | 69.67,69.67 69.67,73.48 | 69.67,110.14 69.67,113.95 | 69.67,150.6 69.67,154.41 | 115.22,29.21 115.22,33.02 | 115.22,69.67 115.22,73.48 | 115.22,110.14 115.22,113.95 | 115.22,150.6 115.22,154.41 | 160.76,29.21 160.76,33.02 | 160.76,69.67 160.76,73.48 | 160.76,110.14 160.76,113.95 | 160.76,150.6 160.76,154.41 | 206.31,29.21 206.31,33.02 | 206.31,69.67 206.31,73.48 | 206.31,110.14 206.31,113.95 | 206.31,150.6 206.31,154.41
N$7
  Bottom 1.016: U$4.PIN_7 U$1.PIN_8 | 21.59,69.67 21.59,73.48 | 21.59,110.14 21.59,113.95 | 21.59,150.6 21.59,154.41 | 67.14,29.21 67.14,33.02 | 67.14,69.67 67.14,73.48 | 67.14,110.14 67.14,113.95 | 67.14,150.6 67.14,154.41 | 112.68,29.21 112.68,33.02 | 112.68,69.67 112.68,73.48 | 112.68,110.14 112.68,113.95 | 112.68,150.6 112.68,154.41 | 158.22,29.21 158.22,33.02 | 158.22,69.67 158.22,73.48 | 158.22,110.14 158.22,113.95 | 158.22,150.6 158.22,154.41 | 203.77,29.21 203.77,33.02 | 203.77,69.67 203.77,73.48 | 203.77,110.14 203.77,113.95 | 203.77,150.6 203.77,154.41
N$8
  Bottom 1.016: U$4.PIN_8 U$1.PIN_9 | 19.05,69.67 19.05,73.48 | 19.05,110.14 19.05,113.95 | 19.05,150.6 19.05,154.41 | 64.59,29.21 64.59,33.02 | 64.59,69.67 64.59,73.48 | 64.59,110.14 64.59,113.95 | 64.59,150.6 64.59,154.41 | 110.14,29.21 110.14,33.02 | 110.14,69.67 110.14,73.48 | 110.14,110.14 110.14,113.95 | 110.14,150.6 110.14,154.41 | 155.69,29.21 155.69,33.02 | 155.69,69.67 155.69,73.48 | 155.69,110.14 155.69,113.95 | 155.69,150.6 155.69,154.41 | 201.23,29.21 201.23,33.02 | 201.23,69.67 201.23,73.48 | 201.23,110.14 201.23,113.95 | 201.23,150.6 201.23,154.41
N$9
  Top 1.016: U$5.PIN_2 6.35,29.84 2.54,29.84 R2.1 | 6.35,73.48 6.35,70.31 2.54,70.31 2.54,68.53 | 6.35,113.95 6.35,110.78 2.54,110.78 2.54,109 | 6.35,154.41 6.35,151.24 2.54,151.24 2.54,149.47 | 51.9,33.02 51.9,29.84 48.09,29.84 48.09,28.07 | 51.9,73.48 51.9,70.31 48.09,70.31 48.09,68.53 | 51.9,113.95 51.9,110.78 48.09,110.78 48.09,109 | 51.9,154.41 51.9,151.24 48.09,151.24 48.09,149.47 | 97.44,33.02 97.44,29.84 93.63,29.84 93.63,28.07 | 97.44,73.48 97.44,70.31 93.63,70.31 93.63,68.53 | 97.44,113.95 97.44,110.78 93.63,110.78 93.63,109 | 97.44,154.41 97.44,151.24 93.63,151.24 93.63,149.47 | 142.99,33.02 142.99,29.84 139.18,29.84 139.18,28.07 | 142.99,73.48 142.99,70.31 139.18,70.31 139.18,68.53 | 142.99,113.95 142.99,110.78 139.18,110.78 139.18,109 | 142.99,154.41 142.99,151.24 139.18,151.24 139.18,149.47 | 188.53,33.02 188.53,29.84 184.72,29.84 184.72,28.07 | 188.53,73.48 188.53,70.31 184.72,70.31 184.72,68.53 | 188.53,113.95 188.53,110.78 184.72,110.78 184.72,109 | 188.53,154.41 188.53,151.24 184.72,151.24 184.72,149.47
N$10  (via drill 0.6)
  Top 1.016: R1.1 2.54,23.5 | 2.54,62.19 2.54,63.96 | 2.54,102.65 2.54,104.42 | 2.54,143.12 2.54,144.89 | 48.09,21.72 48.09,23.5 | 48.09,62.19 48.09,63.96 | 48.09,102.65 48.09,104.42 | 48.09,143.12 48.09,144.89 | 93.63,21.72 93.63,23.5 | 93.63,62.19 93.63,63.96 | 93.63,102.65 93.63,104.42 | 93.63,143.12 93.63,144.89 | 139.18,21.72 139.18,23.5 | 139.18,62.19 139.18,63.96 | 139.18,102.65 139.18,104.42 | 139.18,143.12 139.18,144.89 | 184.72,21.72 184.72,23.5 | 184.72,62.19 184.72,63.96 | 184.72,102.65 184.72,104.42 | 184.72,143.12 184.72,144.89 | 2.54,23.5 R2.2 | 2.54,63.96 2.54,65.73 | 2.54,104.42 2.54,106.2 | 2.54,144.89 2.54,146.66 | 48.09,23.5 48.09,25.27 | 48.09,63.96 48.09,65.73 | 48.09,104.42 48.09,106.2 | 48.09,144.89 48.09,146.66 | 93.63,23.5 93.63,25.27 | 93.63,63.96 93.63,65.73 | 93.63,104.42 93.63,106.2 | 93.63,144.89 93.63,146.66 | 139.18,23.5 139.18,25.27 | 139.18,63.96 139.18,65.73 | 139.18,104.42 139.18,106.2 | 139.18,144.89 139.18,146.66 | 184.72,23.5 184.72,25.27 | 184.72,63.96 184.72,65.73 | 184.72,104.42 184.72,106.2 | 184.72,144.89 184.72,146.66 | v5.71,23.5 2.54,23.5 | v5.71,63.96 2.54,63.96 | v5.71,104.42 2.54,104.42 | v5.71,144.89 2.54,144.89 | v51.26,23.5 48.09,23.5 | v51.26,63.96 48.09,63.96 | v51.26,104.42 48.09,104.42 | v51.26,144.89 48.09,144.89 | v96.81,23.5 93.63,23.5 | v96.81,63.96 93.63,63.96 | v96.81,104.42 93.63,104.42 | v96.81,144.89 93.63,144.89 | v142.35,23.5 139.18,23.5 | v142.35,63.96 139.18,63.96 | v142.35,104.42 139.18,104.42 | v142.35,144.89 139.18,144.89 | v187.9,23.5 184.72,23.5 | v187.9,63.96 184.72,63.96 | v187.9,104.42 184.72,104.42 | v187.9,144.89 184.72,144.89
  Bottom 1.016: U$3.PIN_13 13.97,19.05 8.89,19.05 8.89,23.5 v5.71,23.5 | 13.97,56.98 13.97,59.52 8.89,59.52 8.89,63.96 v5.71,63.96 | 13.97,97.44 13.97,99.98 8.89,99.98 8.89,104.42 v5.71,104.42 | 13.97,137.91 13.97,140.44 8.89,140.44 8.89,144.89 v5.71,144.89 | 59.52,16.51 59.52,19.05 54.44,19.05 54.44,23.5 v51.26,23.5 | 59.52,56.98 59.52,59.52 54.44,59.52 54.44,63.96 v51.26,63.96 | 59.52,97.44 59.52,99.98 54.44,99.98 54.44,104.42 v51.26,104.42 | 59.52,137.91 59.52,140.44 54.44,140.44 54.44,144.89 v51.26,144.89 | 105.06,16.51 105.06,19.05 99.98,19.05 99.98,23.5 v96.81,23.5 | 105.06,56.98 105.06,59.52 99.98,59.52 99.98,63.96 v96.81,63.96 | 105.06,97.44 105.06,99.98 99.98,99.98 99.98,104.42 v96.81,104.42 | 105.06,137.91 105.06,140.44 99.98,140.44 99.98,144.89 v96.81,144.89 | 150.6,16.51 150.6,19.05 145.53,19.05 145.53,23.5 v142.35,23.5 | 150.6,56.98 150.6,59.52 145.53,59.52 145.53,63.96 v142.35,63.96 | 150.6,97.44 150.6,99.98 145.53,99.98 145.53,104.42 v142.35,104.42 | 150.6,137.91 150.6,140.44 145.53,140.44 145.53,144.89 v142.35,144.89 | 196.15,16.51 196.15,19.05 191.07,19.05 191.07,23.5 v187.9,23.5 | 196.15,56.98 196.15,59.52 191.07,59.52 191.07,63.96 v187.9,63.96 | 196.15,97.44 196.15,99.98 191.07,99.98 191.07,104.42 v187.9,104.42 | 196.15,137.91 196.15,140.44 191.07,140.44 191.07,144.89 v187.9,144.89
N$11
  Bottom 1.016: U$3.PIN_11 U$4.PIN_13 | 19.05,56.98 19.05,62.05 | 19.05,97.44 19.05,102.52 | 19.05,137.91 19.05,142.99 | 64.59,16.51 64.59,21.59 | 64.59,56.98 64.59,62.05 | 64.59,97.44 64.59,102.52 | 64.59,137.91 64.59,142.99 | 110.14,16.51 110.14,21.59 | 110.14,56.98 110.14,62.05 | 110.14,97.44 110.14,102.52 | 110.14,137.91 110.14,142.99 | 155.69,16.51 155.69,21.59 | 155.69,56.98 155.69,62.05 | 155.69,97.44 155.69,102.52 | 155.69,137.91 155.69,142.99 | 201.23,16.51 201.23,21.59 | 201.23,56.98 201.23,62.05 | 201.23,97.44 201.23,102.52 | 201.23,137.91 201.23,142.99
N$12
  Bottom 1.016: U$3.PIN_12 U$4.PIN_12 | 16.51,56.98 16.51,62.05 | 16.51,97.44 16.51,102.52 | 16.51,137.91 16.51,142.99 | 62.05,16.51 62.05,21.59 | 62.05,56.98 62.05,62.05 | 62.05,97.44 62.05,102.52 | 62.05,137.91 62.05,142.99 | 107.6,16.51 107.6,21.59 | 107.6,56.98 107.6,62.05 | 107.6,97.44 107.6,102.52 | 107.6,137.91 107.6,142.99 | 153.15,16.51 153.15,21.59 | 153.15,56.98 153.15,62.05 | 153.15,97.44 153.15,102.52 | 153.15,137.91 153.15,142.99 | 198.69,16.51 198.69,21.59 | 198.69,56.98 198.69,62.05 | 198.69,97.44 198.69,102.52 | 198.69,137.91 198.69,142.99
N$13
  Bottom 1.016: U$3.PIN_10 U$4.PIN_14 | 21.59,56.98 21.59,62.05 | 21.59,97.44 21.59,102.52 | 21.59,137.91 21.59,142.99 | 67.14,16.51 67.14,21.59 | 67.14,56.98 67.14,62.05 | 67.14,97.44 67.14,102.52 | 67.14,137.91 67.14,142.99 | 112.68,16.51 112.68,21.59 | 112.68,56.98 112.68,62.05 | 112.68,97.44 112.68,102.52 | 112.68,137.91 112.68,142.99 | 158.22,16.51 158.22,21.59 | 158.22,56.98 158.22,62.05 | 158.22,97.44 158.22,102.52 | 158.22,137.91 158.22,142.99 | 203.77,16.51 203.77,21.59 | 203.77,56.98 203.77,62.05 | 203.77,97.44 203.77,102.52 | 203.77,137.91 203.77,142.99
N$14
  Bottom 1.016: U$3.PIN_9 U$4.PIN_15 | 24.13,56.98 24.13,62.05 | 24.13,97.44 24.13,102.52 | 24.13,137.91 24.13,142.99 | 69.67,16.51 69.67,21.59 | 69.67,56.98 69.67,62.05 | 69.67,97.44 69.67,102.52 | 69.67,137.91 69.67,142.99 | 115.22,16.51 115.22,21.59 | 115.22,56.98 115.22,62.05 | 115.22,97.44 115.22,102.52 | 115.22,137.91 115.22,142.99 | 160.76,16.51 160.76,21.59 | 160.76,56.98 160.76,62.05 | 160.76,97.44 160.76,102.52 | 160.76,137.91 160.76,142.99 | 206.31,16.51 206.31,21.59 | 206.31,56.98 206.31,62.05 | 206.31,97.44 206.31,102.52 | 206.31,137.91 206.31,142.99
N$15
  Bottom 1.016: U$3.PIN_8 U$4.PIN_16 | 26.67,56.98 26.67,62.05 | 26.67,97.44 26.67,102.52 | 26.67,137.91 26.67,142.99 | 72.22,16.51 72.22,21.59 | 72.22,56.98 72.22,62.05 | 72.22,97.44 72.22,102.52 | 72.22,137.91 72.22,142.99 | 117.76,16.51 117.76,21.59 | 117.76,56.98 117.76,62.05 | 117.76,97.44 117.76,102.52 | 117.76,137.91 117.76,142.99 | 163.31,16.51 163.31,21.59 | 163.31,56.98 163.31,62.05 | 163.31,97.44 163.31,102.52 | 163.31,137.91 163.31,142.99 | 208.85,16.51 208.85,21.59 | 208.85,56.98 208.85,62.05 | 208.85,97.44 208.85,102.52 | 208.85,137.91 208.85,142.99
N$16
  Bottom 1.016: U$3.PIN_7 29.21,8.89 U$4.PIN_17 | 26.67,49.35 29.21,49.35 29.21,62.05 | 26.67,89.82 29.21,89.82 29.21,102.52 | 26.67,130.28 29.21,130.28 29.21,142.99 | 72.22,8.89 74.75,8.89 74.75,21.59 | 72.22,49.35 74.75,49.35 74.75,62.05 | 72.22,89.82 74.75,89.82 74.75,102.52 | 72.22,130.28 74.75,130.28 74.75,142.99 | 117.76,8.89 120.3,8.89 120.3,21.59 | 117.76,49.35 120.3,49.35 120.3,62.05 | 117.76,89.82 120.3,89.82 120.3,102.52 | 117.76,130.28 120.3,130.28 120.3,142.99 | 163.31,8.89 165.84,8.89 165.84,21.59 | 163.31,49.35 165.84,49.35 165.84,62.05 | 163.31,89.82 165.84,89.82 165.84,102.52 | 163.31,130.28 165.84,130.28 165.84,142.99 | 208.85,8.89 211.39,8.89 211.39,21.59 | 208.85,49.35 211.39,49.35 211.39,62.05 | 208.85,89.82 211.39,89.82 211.39,102.52 | 208.85,130.28 211.39,130.28 211.39,142.99
N$17
  Bottom 1.016: U$3.PIN_6 24.13,6.35 31.75,6.35 U$4.PIN_18 | 24.13,49.35 24.13,46.81 31.75,46.81 31.75,62.05 | 24.13,89.82 24.13,87.28 31.75,87.28 31.75,102.52 | 24.13,130.28 24.13,127.75 31.75,127.75 31.75,142.99 | 69.67,8.89 69.67,6.35 77.3,6.35 77.3,21.59 | 69.67,49.35 69.67,46.81 77.3,46.81 77.3,62.05 | 69.67,89.82 69.67,87.28 77.3,87.28 77.3,102.52 | 69.67,130.28 69.67,127.75 77.3,127.75 77.3,142.99 | 115.22,8.89 115.22,6.35 122.84,6.35 122.84,21.59 | 115.22,49.35 115.22,46.81 122.84,46.81 122.84,62.05 | 115.22,89.82 115.22,87.28 122.84,87.28 122.84,102.52 | 115.22,130.28 115.22,127.75 122.84,127.75 122.84,142.99 | 160.76,8.89 160.76,6.35 168.38,6.35 168.38,21.59 | 160.76,49.35 160.76,46.81 168.38,46.81 168.38,62.05 | 160.76,89.82 160.76,87.28 168.38,87.28 168.38,102.52 | 160.76,130.28 160.76,127.75 168.38,127.75 168.38,142.99 | 206.31,8.89 206.31,6.35 213.93,6.35 213.93,21.59 | 206.31,49.35 206.31,46.81 213.93,46.81 213.93,62.05 | 206.31,89.82 206.31,87.28 213.93,87.28 213.93,102.52 | 206.31,130.28 206.31,127.75 213.93,127.75 213.93,142.99
N$18
  Top 1.016: U$3.PIN_3 16.51,13.97 29.21,13.97 29.21,19.05 34.29,19.05 U$4.PIN_19 | 16.51,49.35 16.51,54.44 29.21,54.44 29.21,59.52 34.29,59.52 34.29,62.05 | 16.51,89.82 16.51,94.9 29.21,94.9 29.21,99.98 34.29,99.98 34.29,102.52 | 16.51,130.28 16.51,135.37 29.21,135.37 29.21,140.44 34.29,140.44 34.29,142.99 | 62.05,8.89 62.05,13.97 74.75,13.97 74.75,19.05 79.83,19.05 79.83,21.59 | 62.05,49.35 62.05,54.44 74.75,54.44 74.75,59.52 79.83,59.52 79.83,62.05 | 62.05,89.82 62.05,94.9 74.75,94.9 74.75,99.98 79.83,99.98 79.83,102.52 | 62.05,130.28 62.05,135.37 74.75,135.37 74.75,140.44 79.83,140.44 79.83,142.99 | 107.6,8.89 107.6,13.97 120.3,13.97 120.3,19.05 125.38,19.05 125.38,21.59 | 107.6,49.35 107.6,54.44 120.3,54.44 120.3,59.52 125.38,59.52 125.38,62.05 | 107.6,89.82 107.6,94.9 120.3,94.9 120.3,99.98 125.38,99.98 125.38,102.52 | 107.6,130.28 107.6,135.37 120.3,135.37 120.3,140.44 125.38,140.44 125.38,142.99 | 153.15,8.89 153.15,13.97 165.84,13.97 165.84,19.05 170.93,19.05 170.93,21.59 | 153.15,49.35 153.15,54.44 165.84,54.44 165.84,59.52 170.93,59.52 170.93,62.05 | 153.15,89.82 153.15,94.9 165.84,94.9 165.84,99.98 170.93,99.98 170.93,102.52 | 153.15,130.28 153.15,135.37 165.84,135.37 165.84,140.44 170.93,140.44 170.93,142.99 | 198.69,8.89 198.69,13.97 211.39,13.97 211.39,19.05 216.47,19.05 216.47,21.59 | 198.69,49.35 198.69,54.44 211.39,54.44 211.39,59.52 216.47,59.52 216.47,62.05 | 198.69,89.82 198.69,94.9 211.39,94.9 211.39,99.98 216.47,99.98 216.47,102.52 | 198.69,130.28 198.69,135.37 211.39,135.37 211.39,140.44 216.47,140.44 216.47,142.99
N$19
  Top 1.016: U$3.PIN_5 21.59,12.06 31.11,12.06 31.11,17.14 36.83,17.14 U$4.PIN_20 | 21.59,49.35 21.59,52.53 31.11,52.53 31.11,57.61 36.83,57.61 36.83,62.05 | 21.59,89.82 21.59,93 31.11,93 31.11,98.08 36.83,98.08 36.83,102.52 | 21.59,130.28 21.59,133.46 31.11,133.46 31.11,138.54 36.83,138.54 36.83,142.99 | 67.14,8.89 67.14,12.06 76.66,12.06 76.66,17.14 82.38,17.14 82.38,21.59 | 67.14,49.35 67.14,52.53 76.66,52.53 76.66,57.61 82.38,57.61 82.38,62.05 | 67.14,89.82 67.14,93 76.66,93 76.66,98.08 82.38,98.08 82.38,102.52 | 67.14,130.28 67.14,133.46 76.66,133.46 76.66,138.54 82.38,138.54 82.38,142.99 | 112.68,8.89 112.68,12.06 122.2,12.06 122.2,17.14 127.92,17.14 127.92,21.59 | 112.68,49.35 112.68,52.53 122.2,52.53 122.2,57.61 127.92,57.61 127.92,62.05 | 112.68,89.82 112.68,93 122.2,93 122.2,98.08 127.92,98.08 127.92,102.52 | 112.68,130.28 112.68,133.46 122.2,133.46 122.2,138.54 127.92,138.54 127.92,142.99 | 158.22,8.89 158.22,12.06 167.75,12.06 167.75,17.14 173.47,17.14 173.47,21.59 | 158.22,49.35 158.22,52.53 167.75,52.53 167.75,57.61 173.47,57.61 173.47,62.05 | 158.22,89.82 158.22,93 167.75,93 167.75,98.08 173.47,98.08 173.47,102.52 | 158.22,130.28 158.22,133.46 167.75,133.46 167.75,138.54 173.47,138.54 173.47,142.99 | 203.77,8.89 203.77,12.06 213.29,12.06 213.29,17.14 219.01,17.14 219.01,21.59 | 203.77,49.35 203.77,52.53 213.29,52.53 213.29,57.61 219.01,57.61 219.01,62.05 | 203.77,89.82 203.77,93 213.29,93 213.29,98.08 219.01,98.08 219.01,102.52 | 203.77,130.28 203.77,133.46 213.29,133.46 213.29,138.54 219.01,138.54 219.01,142.99
N$20
  Bottom 1.016: U$4.PIN_9 U$1.PIN_10 13.97,33.02 U$4.PIN_10 | 16.51,69.67 16.51,73.48 13.97,73.48 13.97,69.67 | 16.51,110.14 16.51,113.95 13.97,113.95 13.97,110.14 | 16.51,150.6 16.51,154.41 13.97,154.41 13.97,150.6 | 62.05,29.21 62.05,33.02 59.52,33.02 59.52,29.21 | 62.05,69.67 62.05,73.48 59.52,73.48 59.52,69.67 | 62.05,110.14 62.05,113.95 59.52,113.95 59.52,110.14 | 62.05,150.6 62.05,154.41 59.52,154.41 59.52,150.6 | 107.6,29.21 107.6,33.02 105.06,33.02 105.06,29.21 | 107.6,69.67 107.6,73.48 105.06,73.48 105.06,69.67 | 107.6,110.14 107.6,113.95 105.06,113.95 105.06,110.14 | 107.6,150.6 107.6,154.41 105.06,154.41 105.06,150.6 | 153.15,29.21 153.15,33.02 150.6,33.02 150.6,29.21 | 153.15,69.67 153.15,73.48 150.6,73.48 150.6,69.67 | 153.15,110.14 153.15,113.95 150.6,113.95 150.6,110.14 | 153.15,150.6 153.15,154.41 150.6,154.41 150.6,150.6 | 198.69,29.21 198.69,33.02 196.15,33.02 196.15,29.21 | 198.69,69.67 198.69,73.48 196.15,73.48 196.15,69.67 | 198.69,110.14 198.69,113.95 196.15,113.95 196.15,110.14 | 198.69,150.6 198.69,154.41 196.15,154.41 196.15,150.6
N$21
  Top 1.016: U$4.PIN_11 13.97,23.5 9.53,23.5 9.53,13.97 13.97,13.97 U$3.PIN_2 | 13.97,62.05 13.97,63.96 9.53,63.96 9.53,54.44 13.97,54.44 13.97,49.35 | 13.97,102.52 13.97,104.42 9.53,104.42 9.53,94.9 13.97,94.9 13.97,89.82 | 13.97,142.99 13.97,144.89 9.53,144.89 9.53,135.37 13.97,135.37 13.97,130.28 | 59.52,21.59 59.52,23.5 55.07,23.5 55.07,13.97 59.52,13.97 59.52,8.89 | 59.52,62.05 59.52,63.96 55.07,63.96 55.07,54.44 59.52,54.44 59.52,49.35 | 59.52,102.52 59.52,104.42 55.07,104.42 55.07,94.9 59.52,94.9 59.52,89.82 | 59.52,142.99 59.52,144.89 55.07,144.89 55.07,135.37 59.52,135.37 59.52,130.28 | 105.06,21.59 105.06,23.5 100.61,23.5 100.61,13.97 105.06,13.97 105.06,8.89 | 105.06,62.05 105.06,63.96 100.61,63.96 100.61,54.44 105.06,54.44 105.06,49.35 | 105.06,102.52 105.06,104.42 100.61,104.42 100.61,94.9 105.06,94.9 105.06,89.82 | 105.06,142.99 105.06,144.89 100.61,144.89 100.61,135.37 105.06,135.37 105.06,130.28 | 150.6,21.59 150.6,23.5 146.16,23.5 146.16,13.97 150.6,13.97 150.6,8.89 | 150.6,62.05 150.6,63.96 146.16,63.96 146.16,54.44 150.6,54.44 150.6,49.35 | 150.6,102.52 150.6,104.42 146.16,104.42 146.16,94.9 150.6,94.9 150.6,89.82 | 150.6,142.99 150.6,144.89 146.16,144.89 146.16,135.37 150.6,135.37 150.6,130.28 | 196.15,21.59 196.15,23.5 191.71,23.5 191.71,13.97 196.15,13.97 196.15,8.89 | 196.15,62.05 196.15,63.96 191.71,63.96 191.71,54.44 196.15,54.44 196.15,49.35 | 196.15,102.52 196.15,104.42 191.71,104.42 191.71,94.9 196.15,94.9 196.15,89.82 | 196.15,142.99 196.15,144.89 191.71,144.89 191.71,135.37 196.15,135.37 196.15,130.28

## Text on the board
tPlace: Temp Sensor | Temp Sensor | Temp Sensor | Temp Sensor | Temp Sensor | MSB | LED Bar | LSB | MSB | LED Bar | LSB | MSB | LED Bar | LSB | MSB | LED Bar | LSB | MSB | LED Bar | LSB | ATtiny84 | ATtiny84 | ATtiny84 | ATtiny84 | ATtiny84 | Next-Make | Next-Make | Next-Make | Next-Make | Next-Make | CPW 2015 | CPW 2015 | CPW 2015 | CPW 2015 | CPW 2015 | Temp Sensor | Temp Sensor | Temp Sensor | Temp Sensor | Temp Sensor | MSB | LSB | MSB | LSB | MSB | LSB | MSB | LSB | MSB | LSB | LED Bar | LED Bar | LED Bar | LED Bar | LED Bar | ATtiny84 | ATtiny84 | ATtiny84 | ATtiny84 | ATtiny84 | Next-Make | Next-Make | Next-Make | Next-Make | Next-Make | CPW 2015 | CPW 2015 | CPW 2015 | CPW 2015 | CPW 2015 | Temp Sensor | Temp Sensor | Temp Sensor | Temp Sensor | Temp Sensor | MSB | LED Bar | LSB | MSB | LED Bar | LSB | MSB | LED Bar | LSB | MSB | LED Bar | LSB | MSB | LED Bar | LSB | ATtiny84 | ATtiny84 | ATtiny84 | ATtiny84 | ATtiny84 | Next-Make | Next-Make | Next-Make | Next-Make | Next-Make | CPW 2015 | CPW 2015 | CPW 2015 | CPW 2015 | CPW 2015 | Temp Sensor | Temp Sensor | Temp Sensor | Temp Sensor | Temp Sensor | MSB | LED Bar | LSB | MSB | LED Bar | LSB | MSB | LED Bar | LSB | MSB | LED Bar | LSB | MSB | LED Bar | LSB | ATtiny84 | ATtiny84 | ATtiny84 | ATtiny84 | ATtiny84 | Next-Make | Next-Make | Next-Make | Next-Make | Next-Make | CPW 2015 | CPW 2015 | CPW 2015 | CPW 2015 | CPW 2015
bPlace: Pistol, archery, | I'm five minutes late! | Remember to smile! | A huge wind tunnel? | The Citgo sign glows | Fencing, sailing on the Charles. | Oh -- just kidding, no I'm not | There's a whole wide world out there, | A nuclear reactor? | Above the lights of Fenway | You a pirate yet? | Thanks, MIT time | waiting to see it. | Come see for yourself! | Ah, Boston skyline | three point one four one | double-oh seven. | My rad acrostic: | Yo I know pi to | How many cool peeps | five nine two six five three five | Not James Bond. That is a class. | In case you haven't noticed, | a thousand places... no grills | Have I met at MIT? | eight nine seven nine | We like numbers here. | This spells MIT. | but I still wear braces. | Too many to count. | Acronyms are cool, | MIT has lots | The Harvard Bridge is | The Quidditch team here | This is MIT | But are sometimes overused. | of three letter acronyms | Three sixty-four point four smoots | Could use a few new members | Ice cream and unicorns in | IHTFP. | known as TLAs | Plus or minus ear | Grab your Firebolt | Every single class | Falling Tetris blocks | A cop in a car | All schools in Cambridge | Cryptic course numbers | Wearing tin foil... | Light up the famed Green Building | Eats donuts in a strange place: | Know that one's the very best: | Are confusing, we admit | To ward off the NSA? | Come by, play a round! | Fuzz on the Great Dome | And it's MIT! | But they're short and sweet | Nope, just dying hair.
tNames: Resistor Array | Resistor Array | Resistor Array | Resistor Array | Resistor Array | 10uF | 10uF | 10uF | 10uF | 10uF | Resistor Array | Resistor Array | Resistor Array | Resistor Array | Resistor Array | 10uF | 10uF | 10uF | 10uF | 10uF | Resistor Array | Resistor Array | Resistor Array | Resistor Array | Resistor Array | 10uF | 10uF | 10uF | 10uF | 10uF | Resistor Array | Resistor Array | Resistor Array | Resistor Array | Resistor Array | 10uF | 10uF | 10uF | 10uF | 10uF
bNames: This is a thermometer that reads out | This is a thermometer that reads out | This is a thermometer that reads out | This is a thermometer that reads out | This is a thermometer that reads out | the temperature in binary. | the temperature in binary. | the temperature in binary. | the temperature in binary. | the temperature in binary. | To read, convert binary output | To read, convert binary output | To read, convert binary output | To read, convert binary output | To read, convert binary output | to base 10, then divide by 10 | to base 10, then divide by 10 | to base 10, then divide by 10 | to base 10, then divide by 10 | to base 10, then divide by 10 | to get temperature in Celcius. | to get temperature in Celcius. | to get temperature in Celcius. | to get temperature in Celcius. | to get temperature in Celcius. | This is a thermometer that reads out | This is a thermometer that reads out | This is a thermometer that reads out | This is a thermometer that reads out | This is a thermometer that reads out | the temperature in binary. | the temperature in binary. | the temperature in binary. | the temperature in binary. | the temperature in binary. | To read, convert binary output | To read, convert binary output | To read, convert binary output | To read, convert binary output | To read, convert binary output | to base 10, then divide by 10 | to base 10, then divide by 10 | to base 10, then divide by 10 | to base 10, then divide by 10 | to base 10, then divide by 10 | to get temperature in Celcius. | to get temperature in Celcius. | to get temperature in Celcius. | to get temperature in Celcius. | to get temperature in Celcius. | This is a thermometer that reads out | This is a thermometer that reads out | This is a thermometer that reads out | This is a thermometer that reads out | This is a thermometer that reads out | the temperature in binary. | the temperature in binary. | the temperature in binary. | the temperature in binary. | the temperature in binary. | To read, convert binary output | To read, convert binary output | To read, convert binary output | To read, convert binary output | To read, convert binary output | to base 10, then divide by 10 | to base 10, then divide by 10 | to base 10, then divide by 10 | to base 10, then divide by 10 | to base 10, then divide by 10 | to get temperature in Celcius. | to get temperature in Celcius. | to get temperature in Celcius. | to get temperature in Celcius. | to get temperature in Celcius. | This is a thermometer that reads out | This is a thermometer that reads out | This is a thermometer that reads out | This is a thermometer that reads out | This is a thermometer that reads out | the temperature in binary. | the temperature in binary. | the temperature in binary. | the temperature in binary. | the temperature in binary. | To read, convert binary output | To read, convert binary output | To read, convert binary output | To read, convert binary output | To read, convert binary output | to base 10, then divide by 10 | to base 10, then divide by 10 | to base 10, then divide by 10 | to base 10, then divide by 10 | to base 10, then divide by 10 | to get temperature in Celcius. | to get temperature in Celcius. | to get temperature in Celcius. | to get temperature in Celcius. | to get temperature in Celcius.